# Altium PCB Pira-Smart-RS485-Addon.PcbDoc (part 2 of 2)
Units mm, origin at the board's own origin, x right, y up, seen from the top; angles counter-clockwise.
Board outline 65.1 x 30.1 mm, 2 copper layers (Top Layer, Bottom Layer); 53 components, 41 nets, 216 pads, 444 vias.
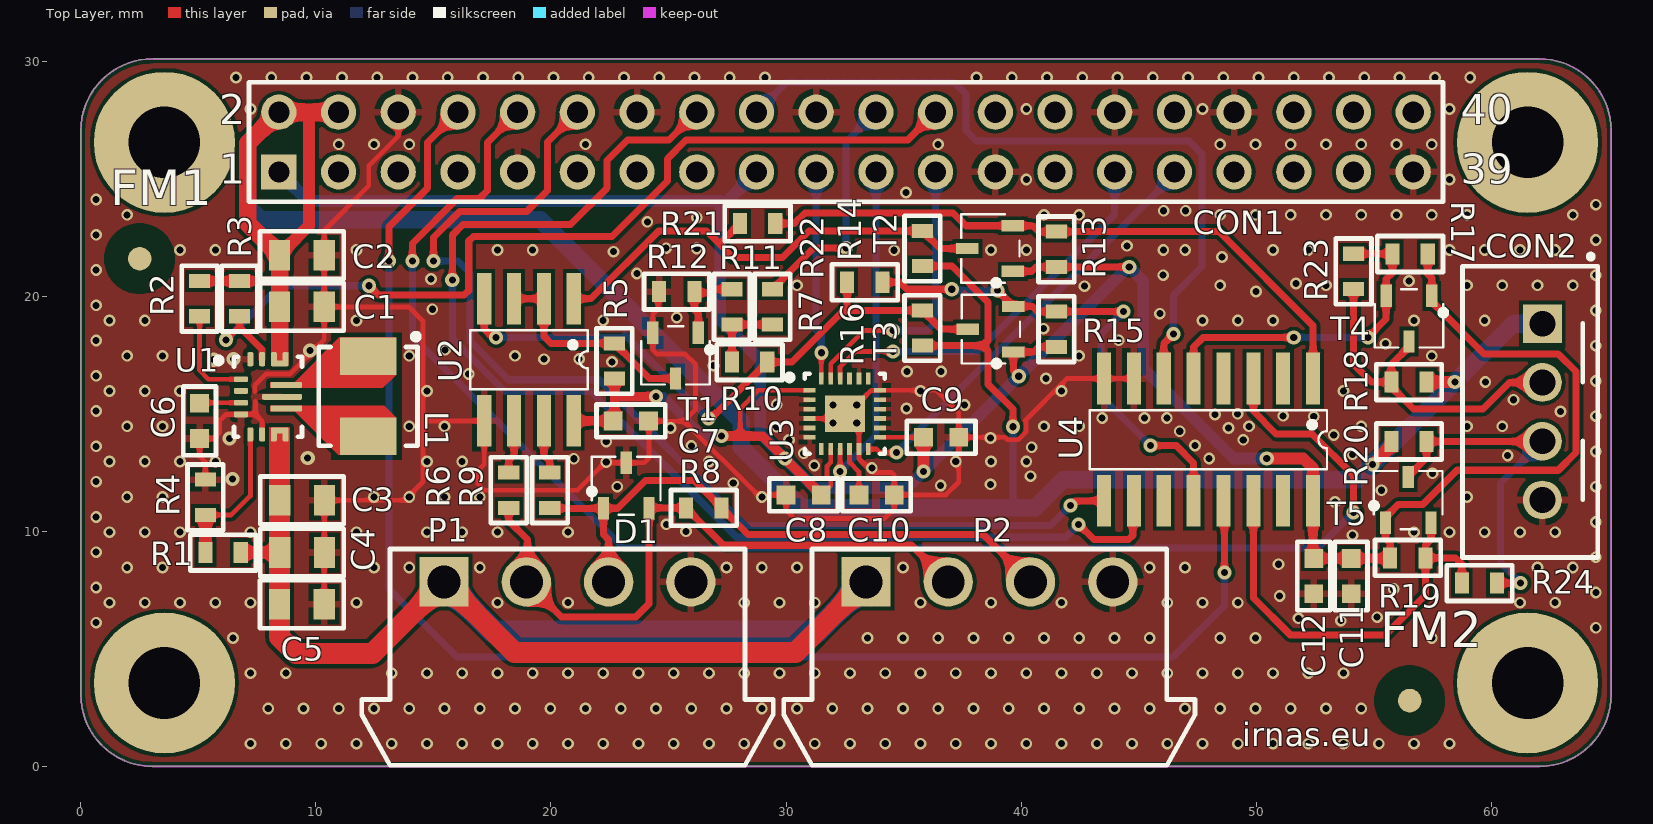
[diagram p0: Top Layer view]

## Via types
v1: diameter 0.5, hole 0.3, Top Layer to Bottom Layer, tented both sides, 398 vias
v2: diameter 0.6, hole 0.3, Top Layer to Bottom Layer, tented both sides, 42 vias
v3: diameter 0.5, hole 0.3, Top Layer to Bottom Layer, tented bottom, 4 vias

## Nets (pads, with @x,y where several pads share a name; then routed paths per layer and width w, separated by ;. In a path a pad name is that pad's centre, name@x,y a point inside that pad or via, vN(x,y) a via of type N, cw(c..) or ccw(c..) an arc to the next point about the centre after c; other vN are vias at no path point) (continued)
GND: (continued)
  other v1: 7.22,0.967 8.72,0.967 10.22,0.967 11.72,0.967 13.22,0.967 14.72,0.967 16.22,0.967 17.72,0.967 19.22,0.967 20.72,0.967 22.22,0.967 23.72,0.967 25.22,0.967 26.72,0.967 28.22,0.967 29.72,0.967 31.22,0.967 32.72,0.967 34.22,0.967 35.72,0.967 37.22,0.967 38.72,0.967 40.22,0.967 41.72,0.967 43.22,0.967 44.72,0.967 46.22,0.967 47.72,0.967 49.22,0.967 50.72,0.967 52.22,0.967 53.72,0.967 55.22,0.967 56.72,0.967 58.22,0.967 7.97,2.467 9.47,2.467 10.97,2.467 12.47,2.467 13.97,2.467 15.47,2.467 16.97,2.467 18.47,2.467 19.97,2.467 21.47,2.467 22.97,2.467 24.47,2.467 25.97,2.467 27.47,2.467 28.97,2.467 30.47,2.467 31.97,2.467 33.47,2.467 34.97,2.467 36.47,2.467 37.97,2.467 39.47,2.467 40.97,2.467 42.47,2.467 43.97,2.467 45.47,2.467 46.97,2.467 48.47,2.467 49.97,2.467 51.47,2.467 52.97,2.467 54.47,2.467 7.22,3.967 8.72,3.967 13.22,3.967 14.72,3.967 16.22,3.967 17.72,3.967 19.22,3.967 20.72,3.967 22.22,3.967 23.72,3.967 25.22,3.967 26.72,3.967 28.22,3.967 29.72,3.967 31.22,3.967 32.72,3.967 34.22,3.967 35.72,3.967 37.22,3.967 38.72,3.967 40.22,3.967 41.72,3.967 43.22,3.967 44.72,3.967 46.22,3.967 47.72,3.967 49.22,3.967 50.72,3.967 52.22,3.967 53.72,3.967 6.47,5.467 33.47,5.467 34.97,5.467 36.47,5.467 37.97,5.467 39.47,5.467 40.97,5.467 42.47,5.467 43.97,5.467 45.47,5.467 48.47,5.467 49.97,5.467 57.47,5.467 64.45,5.9 0.65,6.116 53.6,6.2 51.8,6.3 55.15,6.35 1.22,6.967 2.72,6.967 4.22,6.967 5.72,6.967 7.22,6.967 11.72,6.967 17.72,6.967 20.72,6.967 28.22,6.967 29.72,6.967 31.22,6.967 35.72,6.967 38.72,6.967 41.72,6.967 46.22,6.967 47.72,6.967 49.22,6.967 61.22,6.967 62.72,6.967 51,7.25 64.45,7.4 55.85,7.55 0.65,7.616 1.97,8.467 3.47,8.467 12.47,8.467 13.97,8.467 16.97,8.467 27.47,8.467 28.97,8.467 30.47,8.467 34.97,8.467 45.47,8.467 46.97,8.467 61.97,8.467 63.47,8.467 50.95,8.6 64.45,8.9 0.65,9.116 54.1,9.838 1.22,9.967 2.72,9.967 4.22,9.967 7.22,9.967 11.72,9.967 14.72,9.967 16.22,9.967 17.72,9.967 20.72,9.967 56.72,9.967 58.22,9.967 59.72,9.967 61.22,9.967 62.72,9.967 25.747,10 24.908,10.3 64.45,10.4 0.65,10.616 53.35,11.25 1.97,11.467 3.47,11.467 12.47,11.467 13.97,11.467 15.47,11.467 16.97,11.467 28.97,11.467 58.97,11.467 55.33,11.75 22.818,11.9 64.45,11.9 36.58,11.95 38.7,12 27.754,12.05 0.65,12.116 40.4,12.35 57.5,12.47 33.65,12.7 31.2,12.8 1.22,12.967 2.72,12.967 4.22,12.967 5.72,12.967 14.72,12.967 16.22,12.967 22.35,12.95 26.72,12.967 37.22,12.967 38.72,12.967 40.22,12.967 20.97,13.09 48,13.098 60.7,13.224 54.1,13.277 30.75,13.32 64.45,13.4 40.45,13.579 0.65,13.616 25.97,13.627 47.4,13.655 22.35,13.827 30.127,13.886 49.45,13.894 38.7,13.976 53.3,14.097 46.75,14.259 25.087,14.4 48.827,14.4 29.6,14.45 1.97,14.467 3.47,14.467 13.97,14.467 15.47,14.467 40.97,14.467 42.47,14.467 49.7,14.467 54.47,14.467 58.97,14.467 60.47,14.467 43.45,14.82 45.25,14.82 46.2,14.82 52.45,14.892 51.15,14.915 64.45,14.9 48.25,14.974 49.212,15 62.95,15.1 0.65,15.116 35.126,15.226 29.6,15.4 37.6,15.381 60.95,15.6 1.22,15.967 2.72,15.967 4.22,15.967 14.72,15.967 35.72,15.967 41.72,15.967 53.72,15.967 59.75,16.35 64.45,16.4 41.056,16.5 0.65,16.616 16.5,16.7 35.15,16.8 36.6,16.8 26.909,17.05 22.6,17.213 19.7,17.327 21.2,17.337 1.97,17.467 3.47,17.467 13.97,17.467 18.47,17.467 42.47,17.467 57.47,17.467 15.492,17.724 64.45,17.9 55.5,17.985 0.65,18.116 44.15,18.13 40.95,18.622 1.22,18.967 2.72,18.967 11.72,18.967 22.22,18.967 47.72,18.967 49.22,18.967 50.72,18.967 56.72,18.967 59.72,18.967 25.35,19.1 45.9,19.26 64.45,19.4 14.95,19.45 0.65,19.616 49.989,20.2 42.7,20.433 30.47,20.467 48.47,20.467 52.97,20.467 58.97,20.467 60.47,20.467 61.97,20.467 63.47,20.467 51.7,20.55 56.5,20.647 14.9,20.735 46.043,20.9 64.45,20.9 23.65,20.974 0.65,21.116 48.55,21.676 22.654,21.9 4.22,21.967 5.72,21.967 11.72,21.967 17.72,21.967 19.22,21.967 34.6,21.96 38.72,21.967 40.22,21.967 46.05,21.967 46.98,21.967 50.72,21.967 52.22,21.967 58.22,21.967 59.72,21.967 61.22,21.967 62.72,21.967 26.2,22.033 24.9,22.05 44.5,22.15 64.45,22.4 0.65,22.616 24.1,23.168 26.202,23.35 1.97,23.467 40.97,23.467 42.47,23.467 48.47,23.467 49.97,23.467 51.47,23.467 52.97,23.467 54.47,23.467 55.97,23.467 57.47,23.467 58.97,23.467 63.47,23.467 46.067,23.64 47,23.64 64.45,23.9 0.65,24.116 35.1,24.414 40.22,24.967 58.22,24.967 10.97,26.467 12.47,26.467 13.97,26.467 21.47,26.467 36.47,26.467 48.47,26.467 49.97,26.467 51.47,26.467 52.97,26.467 54.47,26.467 55.97,26.467 57.47,26.467 7.22,27.967 40.22,27.967 47.72,27.967 58.22,27.967 6.603,29.309 8.103,29.309 9.603,29.309 11.103,29.309 12.603,29.309 14.103,29.309 15.603,29.309 17.103,29.309 18.603,29.309 20.103,29.309 21.603,29.309 23.103,29.309 24.603,29.309 26.103,29.309 27.603,29.309 29.103,29.309 38.103,29.309 39.603,29.309 41.103,29.309 42.603,29.309 44.103,29.309 45.603,29.309 47.103,29.309 48.603,29.309 50.103,29.309 51.603,29.309 53.103,29.309 54.603,29.309 56.103,29.309 57.603,29.309 59.103,29.309
  other v2: 6.45,12.224 9.65,13.127 6.32,13.95 5.65,17.303 6.5,17.327 9.75,17.7
MISO: CON1.21 U3.9 | length 14.3
  Top Layer w0.203: v2(32.3,12.55) U3.9
  Bottom Layer w0.3: v2(32.3,12.55) 33.822,14.072 CON1.21
MOSI: CON1.19 U3.24 | length 8.9
  Top Layer w0.203: U3.24 v2(31.5,17.6)
  Bottom Layer w0.3: CON1.19 31.282,18.568 31.5,18.35 v2(31.5,17.6)
NetC6_2: C6.2 U1.3 | length 1.8
  Top Layer w0.203: C6.2 5.074,15.474 U1.3
NetC10_1: C10.1 U3.10 | length 2.1
  Top Layer w0.203: U3.10 32.7,12.933 33.1,12.533 C10.1
NetL1_1: L1.1 U1.11
NetL1_2: L1.2 U1.9
NetR1_1: R1.1 R4.2 U1.5 | length 6.5
  Top Layer w0.203: R4.2 6.4,10.7 7.211,11.511 U1.5
  Top Layer w0.5: R1.1 R4.2
NetR2_1: R2.1 U1.1 | length 4.2
  Top Layer w0.203: R2.1 5.05,16.85 5.426,16.474 U1.1
NetR5_1: R5.1 T1.3 U2.2 U2.3 | length 9.2
  Top Layer w0.3: U2.3 U2.2 19.7,18.3 20,18 R5.1 ; R5.1@22.68,18.02 R5.1 ; T1.3 24.196,16.504 R5.1
NetR6_1: R6.1 U2.7 | length 2.3
  Top Layer w0.3: U2.7 19.7,13.227 19.95,12.977 R6.1
NetR7_1: R7.1 R10.1 R11.2 | length 3.3
  Top Layer w0.3: R10.1 R11.2 R7.1
NetR9_1: R9.1 U2.6 | length 2.3
  Top Layer w0.3: R9.1 18.2,13.02 18.43,13.25 U2.6
NetR11_1: R11.1 R12.2 T1.1 | length 3.5
  Top Layer w0.3: T1.1 26.27,19.25 26.1,19.42 R12.2 26.15,20.15 26.729,20.15 26.879,20.3 R11.1
RS485_RX: R14.1 R21.2 T2.3 U2.1 | length 20.4
  Top Layer w0.3: U2.1 21.7,19.9 24.583,22.783 26.617,22.783 27.184,22.216 ; R21.2 27.184,22.244 27.184,22.216 ; T2.3 36.55,22.033 R14.1 30.983,22.783 29.85,21.65 27.75,21.65 27.184,22.216
RS485_TX: R10.2 R16.1 R22.2 T3.3 U2.4 | length 27
  Top Layer w0.3: U2.4 17.16,18.611 17.521,18.25 v2(17.667,18.25) ; v2(26.7,14.8) 26.8,14.8 R10.2 30.248,17.2 32.448,19.4 ; R22.2 32.6,19.552 32.448,19.4 ; T3.3 36.6,18.6 R16.1 32.448,19.4
  Bottom Layer w0.3: v2(17.667,18.25) 23.05,18.25 23.15,18.35 v2(26.7,14.8)
RX2: CON2.2 R18.1 R23.2 T4.3 | length 14.7
  Top Layer w0.3: R23.2 54.142,17.108 54.9,16.35 R18.1 ; T4.3 56.5,17.85 55.75,17.1 R18.1 ; CON2.2 60.784,16.334 59.65,15.2 56.7,15.2 55.75,16.15 R18.1
SCK: CON1.23 U3.23 | length 12.2
  Top Layer w0.203: U3.23 31.9,17.122 33.328,18.55 v2(34.55,18.55)
  Bottom Layer w0.3: v2(34.55,18.55) 36,18.55 36.362,18.912 CON1.23
TX2: CON2.3 R20.1 R24.2 T5.3 | length 14.9
  Top Layer w0.3: T5.3 56.47,12.34 57.25,13.12 R20.1 62.167,13.824 CON2.3 ; R24.2 v2(61.25,7.8)
  Bottom Layer w0.3: v2(61.25,7.8) 60.4,8.65 60.4,12.056 CON2.3
UART_INH: CON1.18 U4.6 | length 31.9
  Top Layer w0.3: U4.6 46.07,17.994 v2(46.476,18.4)
  Bottom Layer w0.3: CON1.18 30.009,29.1 37.15,29.1 37.65,28.6 37.65,27.05 38.1,26.6 47.15,26.6 47.7,26.05 47.7,21.27 46.476,20.046 v2(46.476,18.4)
UART_RX: CON1.10 U4.3 | length 64.7
  Top Layer w0.3: v2(14.1,21.5) 14.1,22.25 16,24.15 16.95,24.15 17.3,24.5 17.3,26.551 CON1.10 ; U4.3 49.88,15.12 50.85,14.15 52.381,14.15 54.142,12.389 v2(54.142,10.8)
  Bottom Layer w0.3: v2(14.1,21.5) 14.1,18.291 23.091,9.3 27.71,9.3 27.713,9.298 52.64,9.298 v2(54.142,10.8)
UART_RX1: R13.1 R21.1 T2.2 U4.1 | length 27.3
  Top Layer w0.3: R21.1 30.35,23.1 30.8,23.55 37.103,23.55 37.65,23.003 39.647,23.003 39.65,23 40.5,23 40.75,22.75 R13.1 48.42,22.75 52.42,18.75 U4.1
UART_RX2: R17.1 R23.1 T4.2 U4.5 | length 14.6
  Top Layer w0.3: U4.5 47.34,17.84 47.75,18.25 v2(51.6,18.25) ; R23.1 55.787,21.813 R17.1 55.8,21 55.53,20.73 T4.2 55.53,19.03 v2(54.75,18.25)
  Bottom Layer w0.3: v2(51.6,18.25) v2(54.75,18.25)
UART_RX3: U4.2
UART_RX4: U4.4
UART_SEL_A: CON1.16 U4.10 | length 52.2
  Top Layer w0.3: v2(15.8,20.7) 15.8,22.6 16.25,23.05 20.833,23.05 22.383,24.6 22.383,25.783 23.25,26.65 25.019,26.65 CON1.16 ; v2(42.45,10.3) 43.1,9.65 44.569,9.65 44.75,9.831 44.75,11.25 U4.10
  Bottom Layer w0.3: v2(15.8,20.7) 15.8,18.2 18.05,15.95 21.7,15.95 27.9,9.75 41.9,9.75 v2(42.45,10.3)
UART_SEL_B: CON1.12 U4.9 | length 45.9
  Top Layer w0.3: v2(15,21.5) 15,22.5 16.1,23.6 18.95,23.6 19.85,24.5 19.85,26.561 CON1.12 ; v2(42.1,11.1) 42.3,11.3 U4.9
  Bottom Layer w0.3: v2(15,21.5) 16.05,21.5 16.55,21 16.55,18.602 16.548,18.6 16.548,18.1 18.198,16.45 22.05,16.45 28.25,10.25 41.25,10.25 v2(42.1,11.1)
UART_TX: CON1.8 U4.13 | length 63.6
  Top Layer w0.3: v2(13.1,21.5) 13.1,22.95 14.75,24.6 14.75,26.541 CON1.8 ; U4.13 48.65,11.26 v2(48.65,8.25)
  Bottom Layer w0.3: v2(13.1,21.5) 13.1,7.55 16,4.65 46.45,4.65 48.65,6.85 v2(48.65,8.25)
UART_TX1: R15.1 R22.1 T3.2 U4.12 | length 21.5
  Top Layer w0.3: R22.1 34.85,20.6 35.15,20.3 v2(37.05,20.3) ; v2(39,20.25) 39,20.24 T3.2 40.48,19.57 40.7,19.35 R15.1 v2(44.35,19.35) ; v2@45.49,13.64 v2(45.5,13.65) 46.6,13.65 47.34,12.91 U4.12
  Bottom Layer w0.3: v2(37.05,20.3) 37.1,20.25 v2(39,20.25) ; v2(44.35,19.35) 43.4,18.4 43.4,15.75 v2(45.5,13.65)
UART_TX2: R19.1 R24.1 T5.2 U4.14 | length 18.4
  Top Layer w0.3: U4.14 49.88,7.17 51.45,5.6 55.5,5.6 57.2,7.3 R19.1 ; T5.2 57.44,9.65 57.2,9.41 R19.1 ; R24.1 58.75,8.6 58.476,8.874 R19.1
UART_TX3: U4.15
UART_TX4: U4.11
pads on no net: CON1.3 CON1.5 CON1.7 CON1.11 CON1.13 CON1.15 CON1.26 CON1.27 CON1.28 CON1.32 CON1.33 CON1.35 CON1.36 CON1.37 CON1.38 CON1.40 FM1.FM FM2.FM U1.2 U3.7 U3.19 U3.21
copper on no net:
  other v3: 31.992,14.619 33.008,14.619 31.992,15.381 33.008,15.381

## Polygon pours and split planes (outlines as drawn)
GND on Bottom Layer "Bottom Layer-GND" (solid, remove dead copper, pour order 38): 0,30.103 0,0 65.101,0 65.101,30.101
GND on Top Layer "Top Layer-GND" (solid, remove dead copper, pour order 36): 0,30.101 65.101,30.101 65.101,0 0,0

## Keep-outs
Keep-Out Layer:
  lines w0.076: 0,3.05 ccw(c3.05,3.05) 3.05,0 62.05,0 ccw(c62.05,3.05) 65.101,3.05 65.101,27.05 ccw(c62.05,27.05) 62.05,30.101 3.05,30.101 ccw(c3.05,30.05) 3.05,30.101 ccw(c3.05,27.05) 0,27.05 0,3.05
Mechanical 1:
  lines w0.1: 62.05,0.05 ccw(c62.05,3.05) 65.05,3.05 ; 0.05,3.05 ccw(c3.05,3.05) 3.05,0.05 ; 0.05,3.05 ccw(c3.05,3.05) 3.05,0.05 ; 0.05,3.05 0.05,27.05 ; 0.05,3.05 0.05,27.05 ; 0.05,27.05 cw(c3.05,27.05) 3.05,30.05 ; 0.05,27.05 cw(c3.05,27.05) 3.05,30.05 ; 3.05,0.05 62.2,0.05 3.05,0.05 ; 3.05,30.05 62.05,30.05 ; 3.05,30.05 62.05,30.05 ; 62.05,30.05 cw(c62.05,27.05) 65.05,27.05 ; 62.05,30.05 cw(c62.05,27.05) 65.05,27.05 ; 65.05,3.05 65.05,27.05 ; 65.05,3.05 65.05,27.05

## Other copper
Top Layer:
  region net +5V: 8.08,21.75 8.08,17.1 8.84,17.1 8.84,21.75
  region net +9V: 8,14.43 8,6.9 8.9,6.9 8.9,14.43
  pour cut-out: 10.65,18.45 13.65,18.45 13.65,13.05 10.65,13.05
  region net NetL1_2: 8.05,15.1 9.1,15.1 10.95,13.25 13.4,13.25 13.4,14.85 12.9,15.35 8.05,15.35
  region net NetL1_1: 8.05,16.1 12.85,16.1 13.4,16.65 13.4,18.25 11,18.25 9.1,16.35 8.05,16.35

## Silkscreen, mask and mechanical layers (free items; w line width, h text height)
Top Overlay:
  text "irnas.eu" at 49.4,0.85 h1
Bottom Overlay:
  text "+5V" at 59.35,18.2 h1
  text "RX2" at 59.35,15.85 h1
  text "TX2" at 59.35,13.3 h1
  text "GND" at 59.35,10.75 h1
  text "irnas.eu / PiRA Smart / RS485 Add-On / V1" at 51,8.15 h2
  text "V+" at 14.85,3.1 h1 r270
  text "A" at 18.5,3.1 h1 r270
  text "B" at 21.8,3.1 h1 r270
  text "GND" at 25.4,3.1 h1 r270
  text "V+" at 32.85,3.1 h1 r270
  text "A" at 36.5,3.1 h1 r270
  text "B" at 39.8,3.1 h1 r270
  text "GND" at 43.4,3.1 h1 r270

## Dimensions
0.05,27.05 to 65.05,27.05 on Mechanical 1
62.05,30.05 to 62.2,0.05 on Mechanical 1

## Text inside footprints (layer, text, board x,y; h text height)
CON1: Mechanical 29 "40" at 58.714,27.325 h1.27; Mechanical 29 "39" at 58.714,24.785 h1.27; Mechanical 29 "2" at 5.882,27.325 h1.27; Mechanical 29 "1" at 5.882,24.785 h1.27; Top Overlay "39" at 58.714,24.785 h1.27; Top Overlay "40" at 58.714,27.325 h1.27; Top Overlay "2" at 5.882,27.325 h1.27; Top Overlay "1" at 5.882,24.785 h1.27